# Altium PCB PCB1.PcbDoc
Units mil, origin at the board's own origin, x right, y up, seen from the top; angles counter-clockwise.
Board outline 2952.76 x 2952.76 mil, 4 copper layers (Top Layer, Mid 1 - POWER, Mid 2 - GND, Bottom Layer), stack 61.913 mil thick; 24 components, 35 nets, 184 pads, 171 vias.
Unrouted connection lines stored in the file: 1.
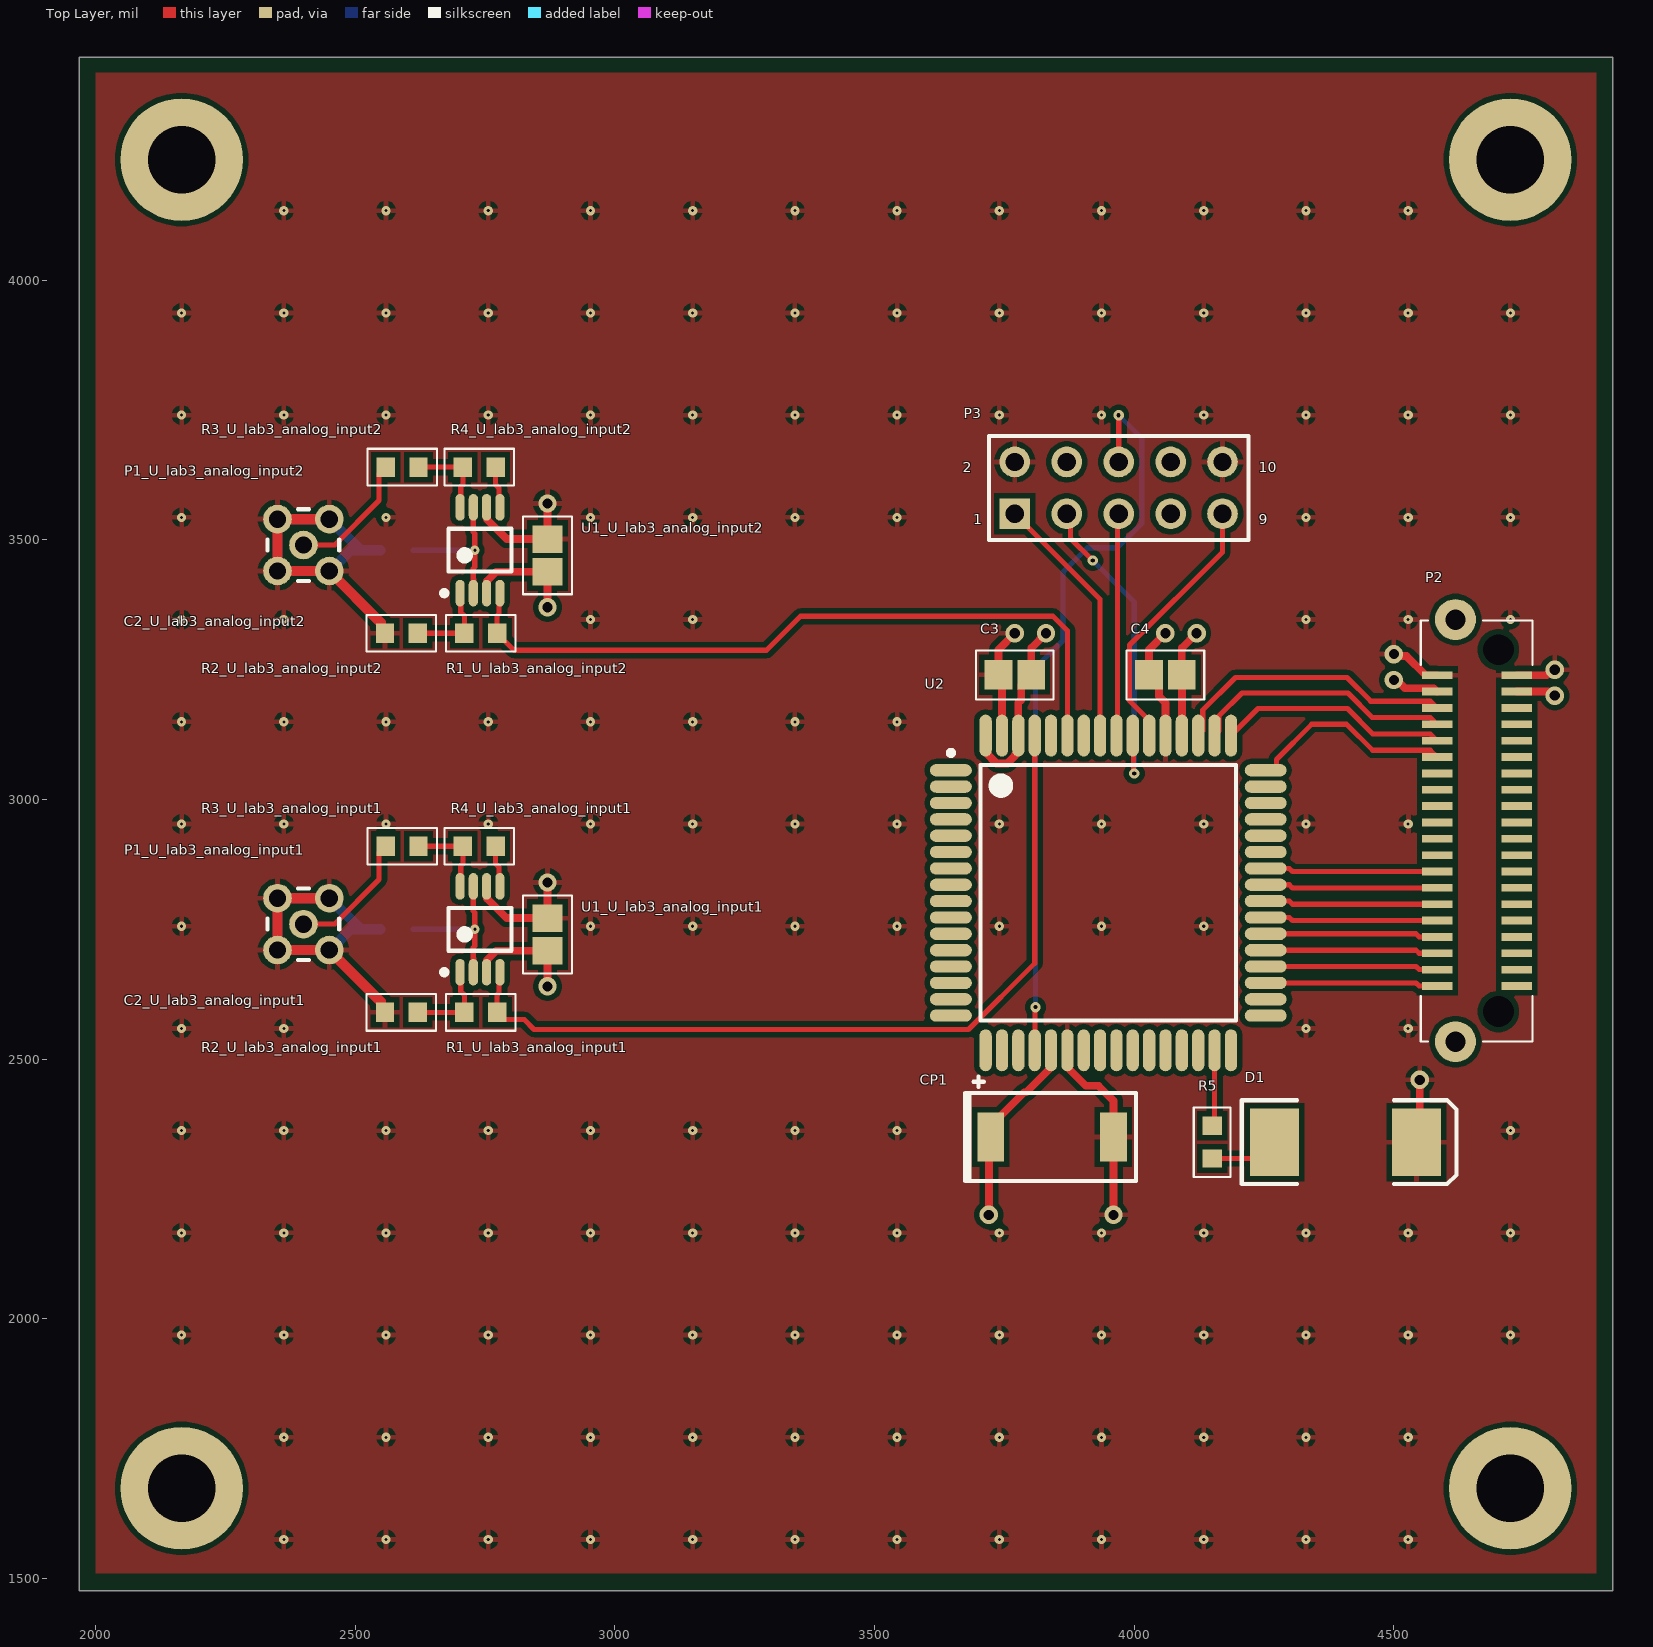
[diagram p0: Top Layer view]
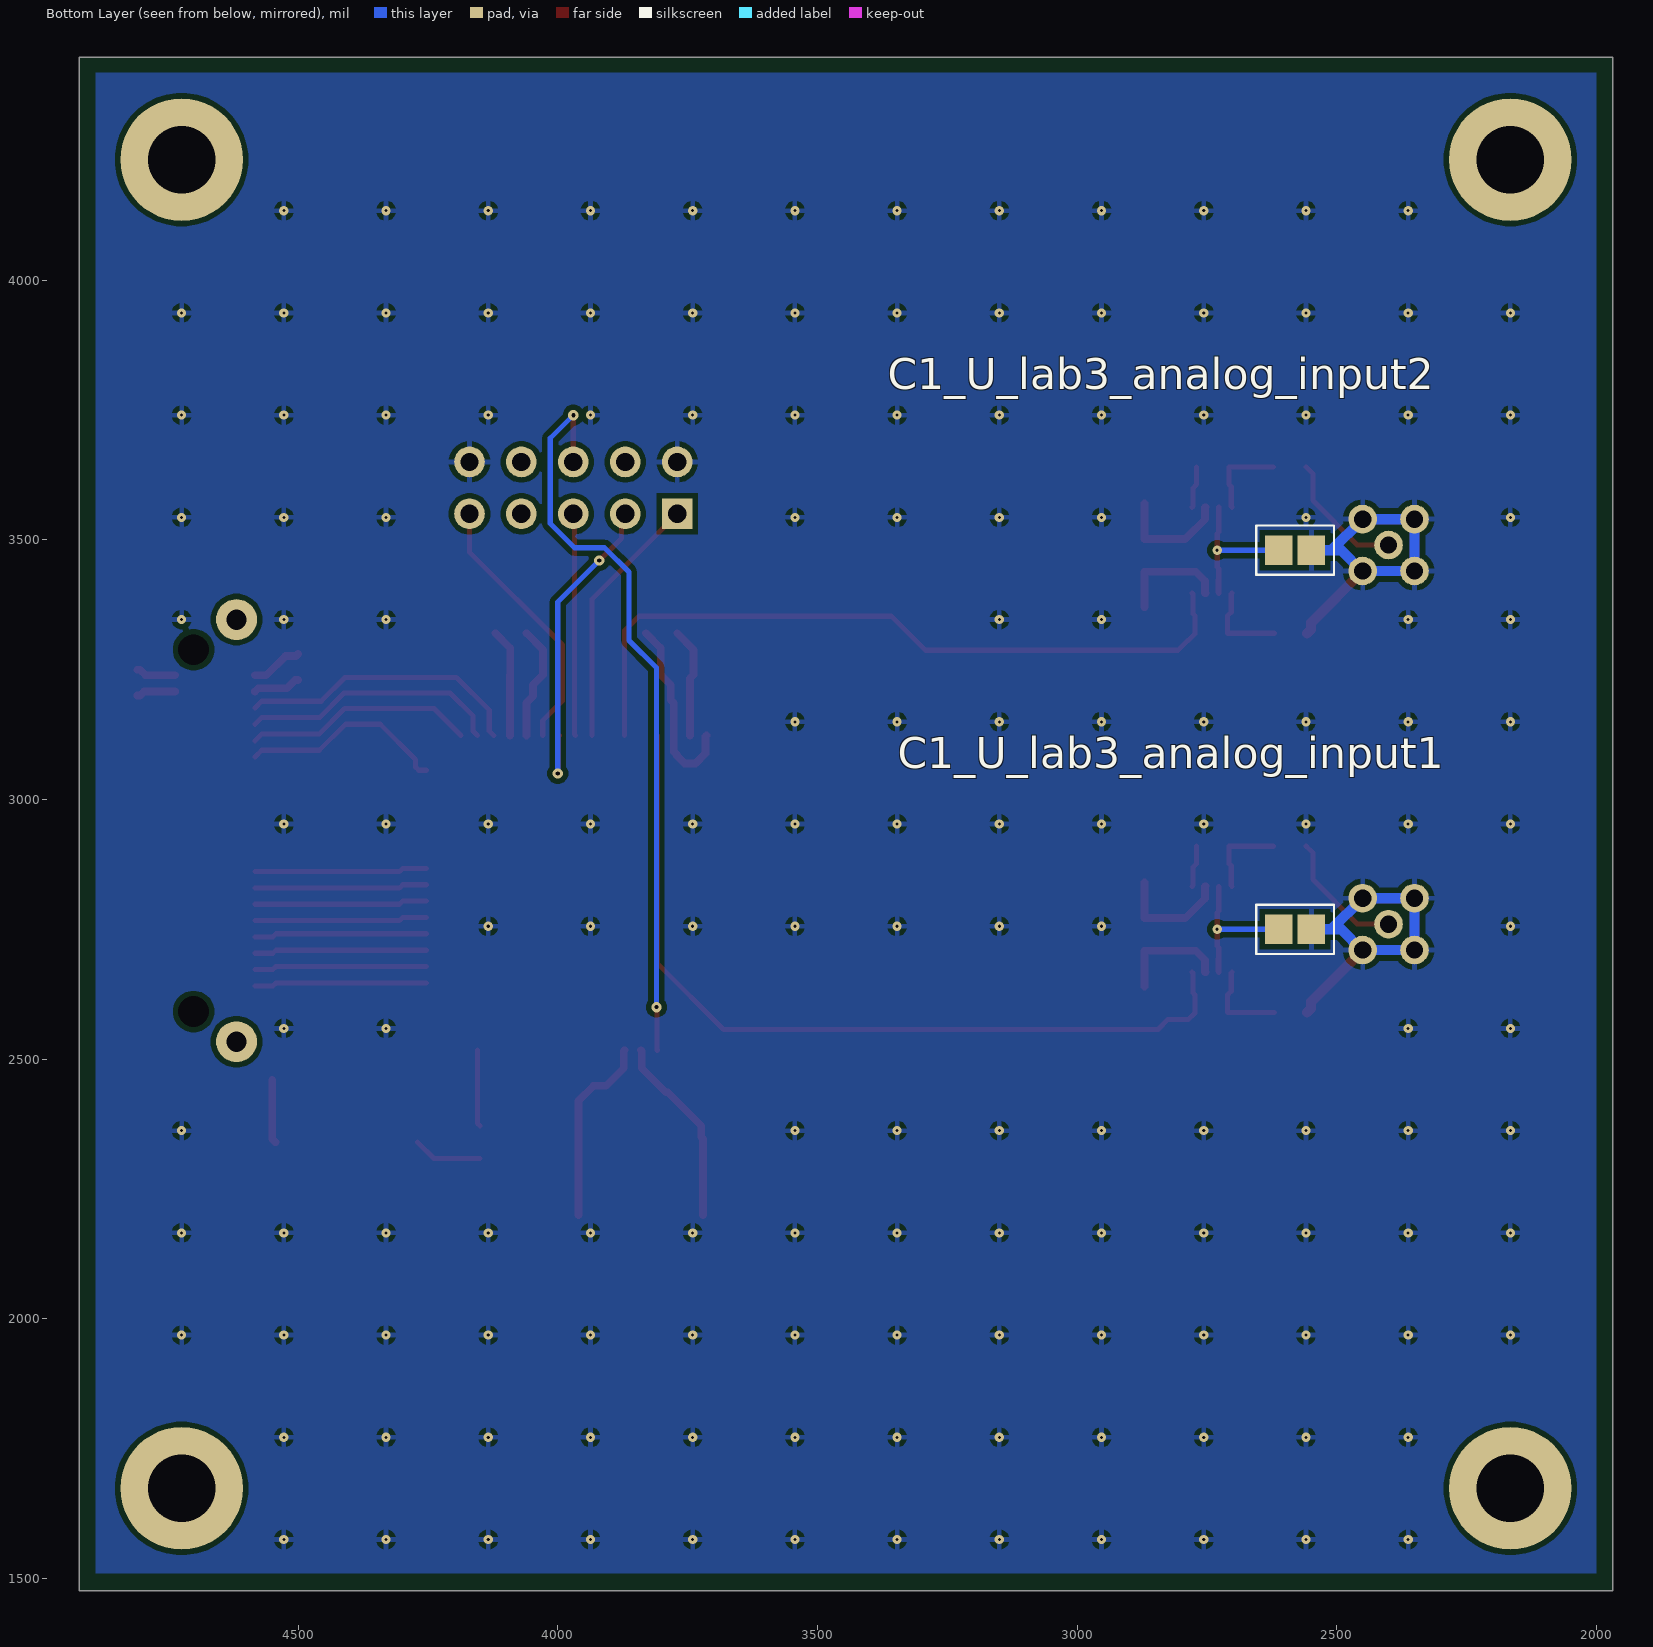
[diagram p1: Bottom Layer view, seen from below]
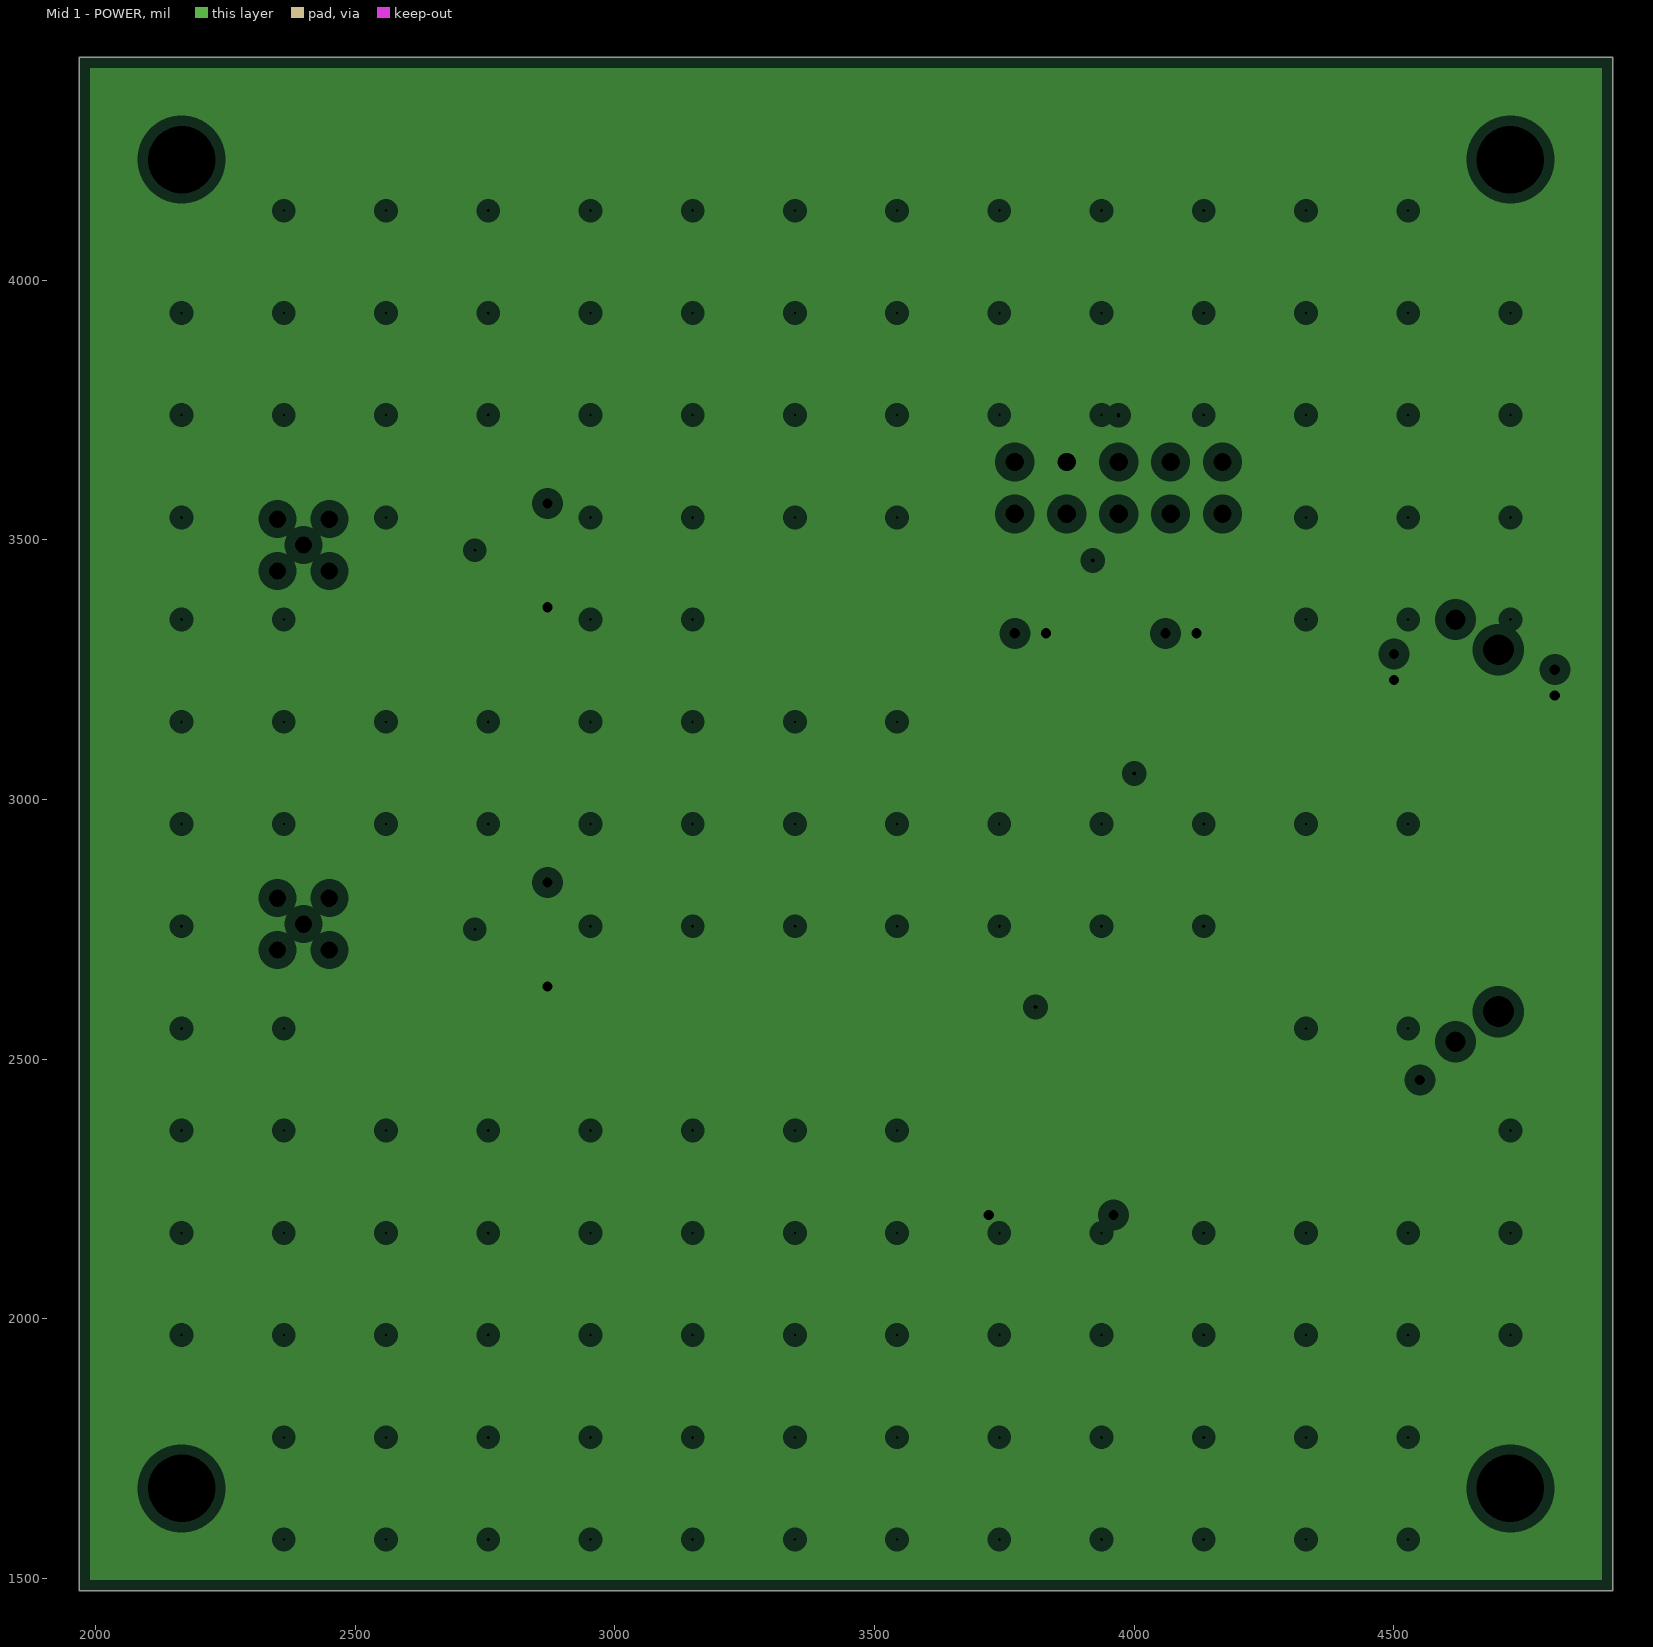
[diagram p2: Mid 1 - POWER, clearances drawn from the general rule]
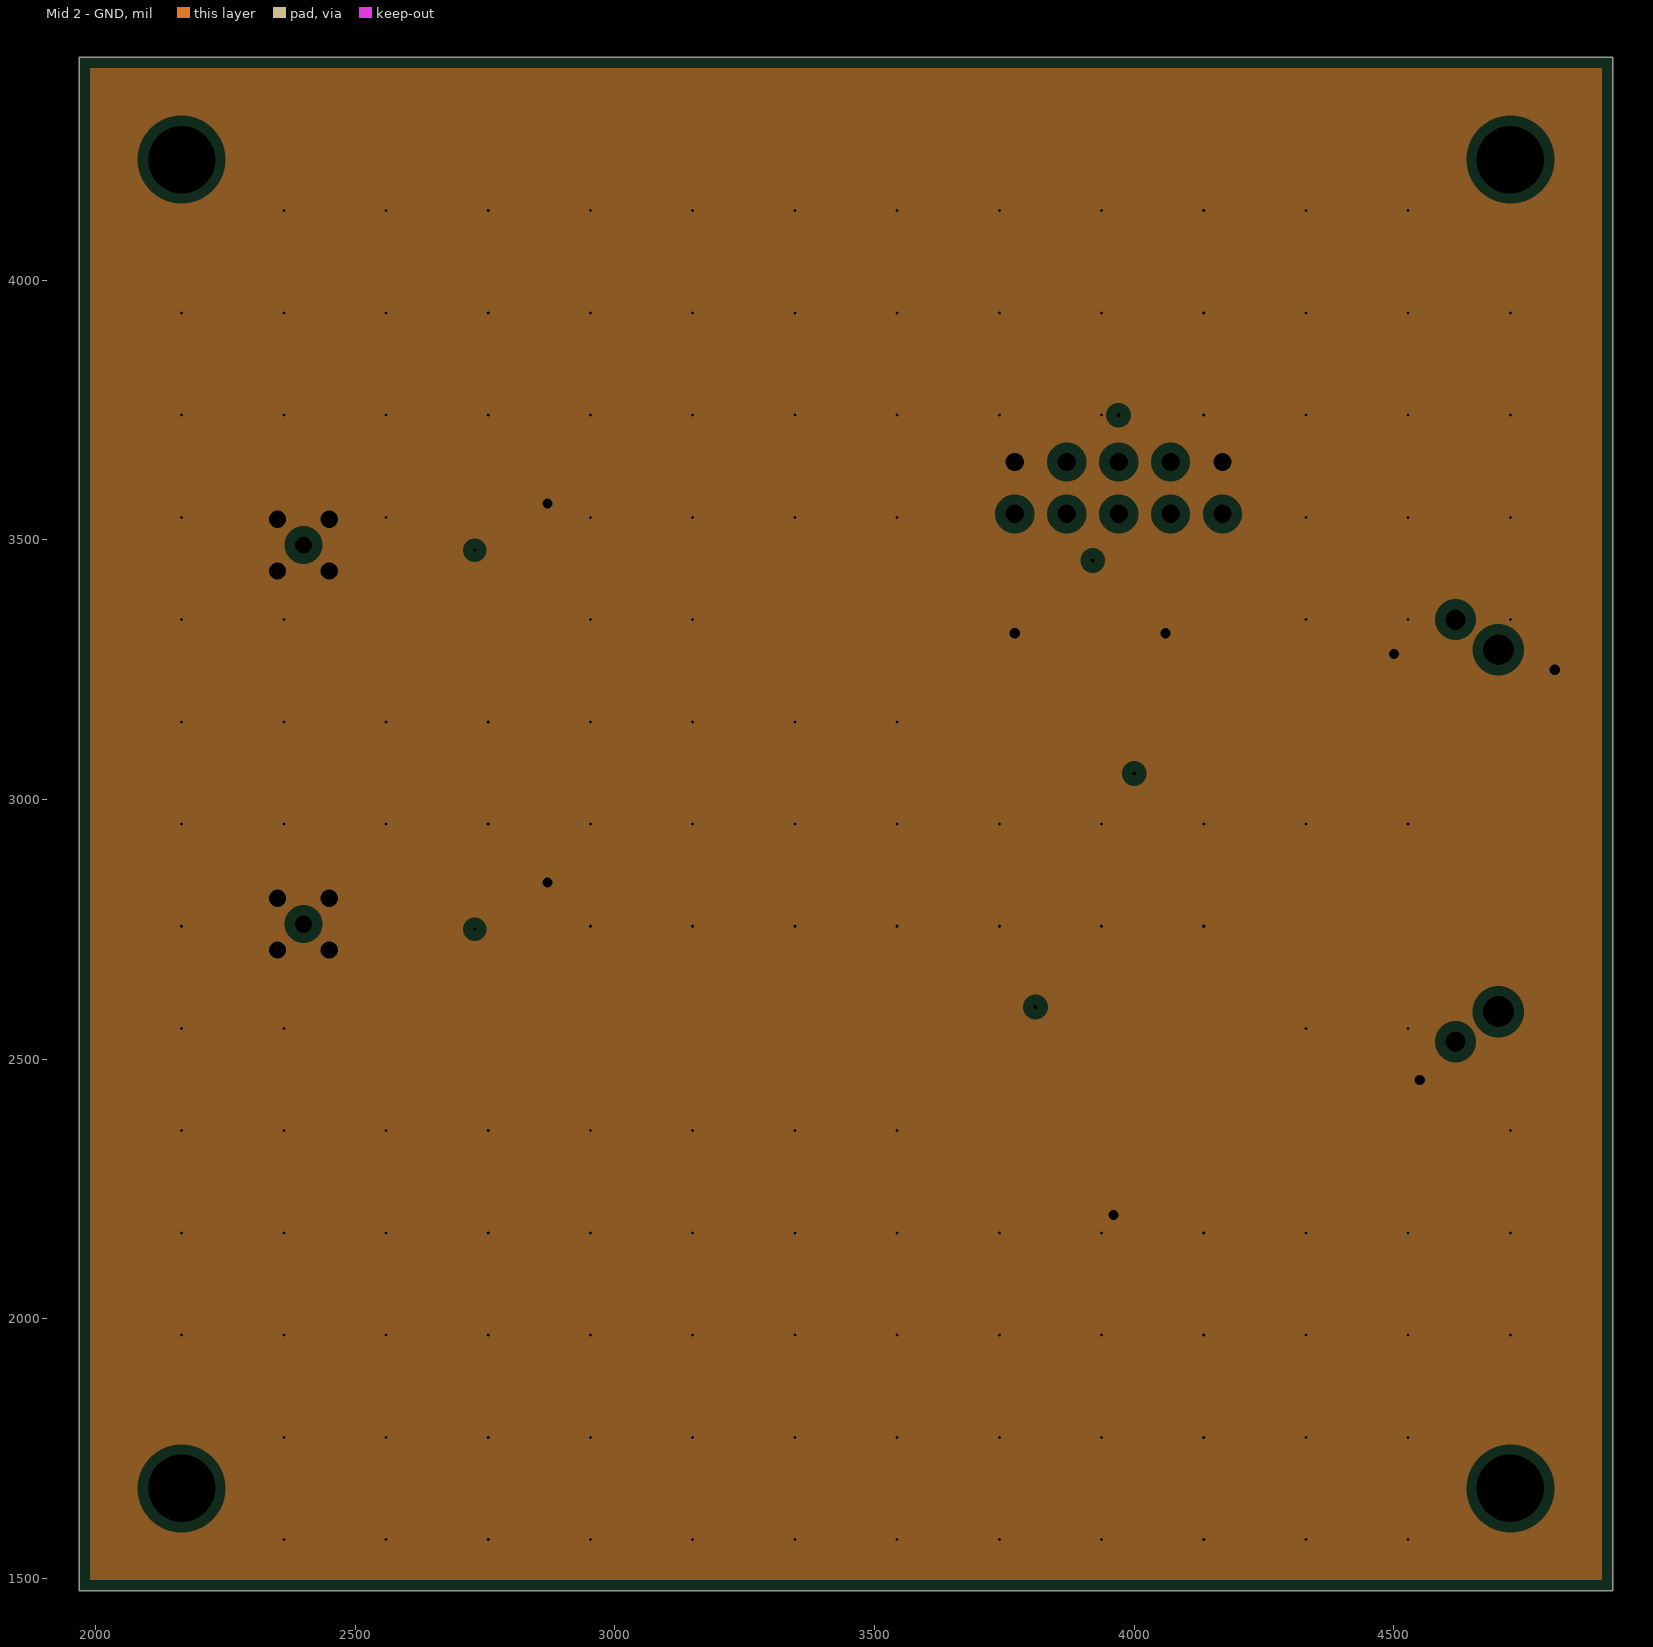
[diagram p3: Mid 2 - GND, clearances drawn from the general rule]
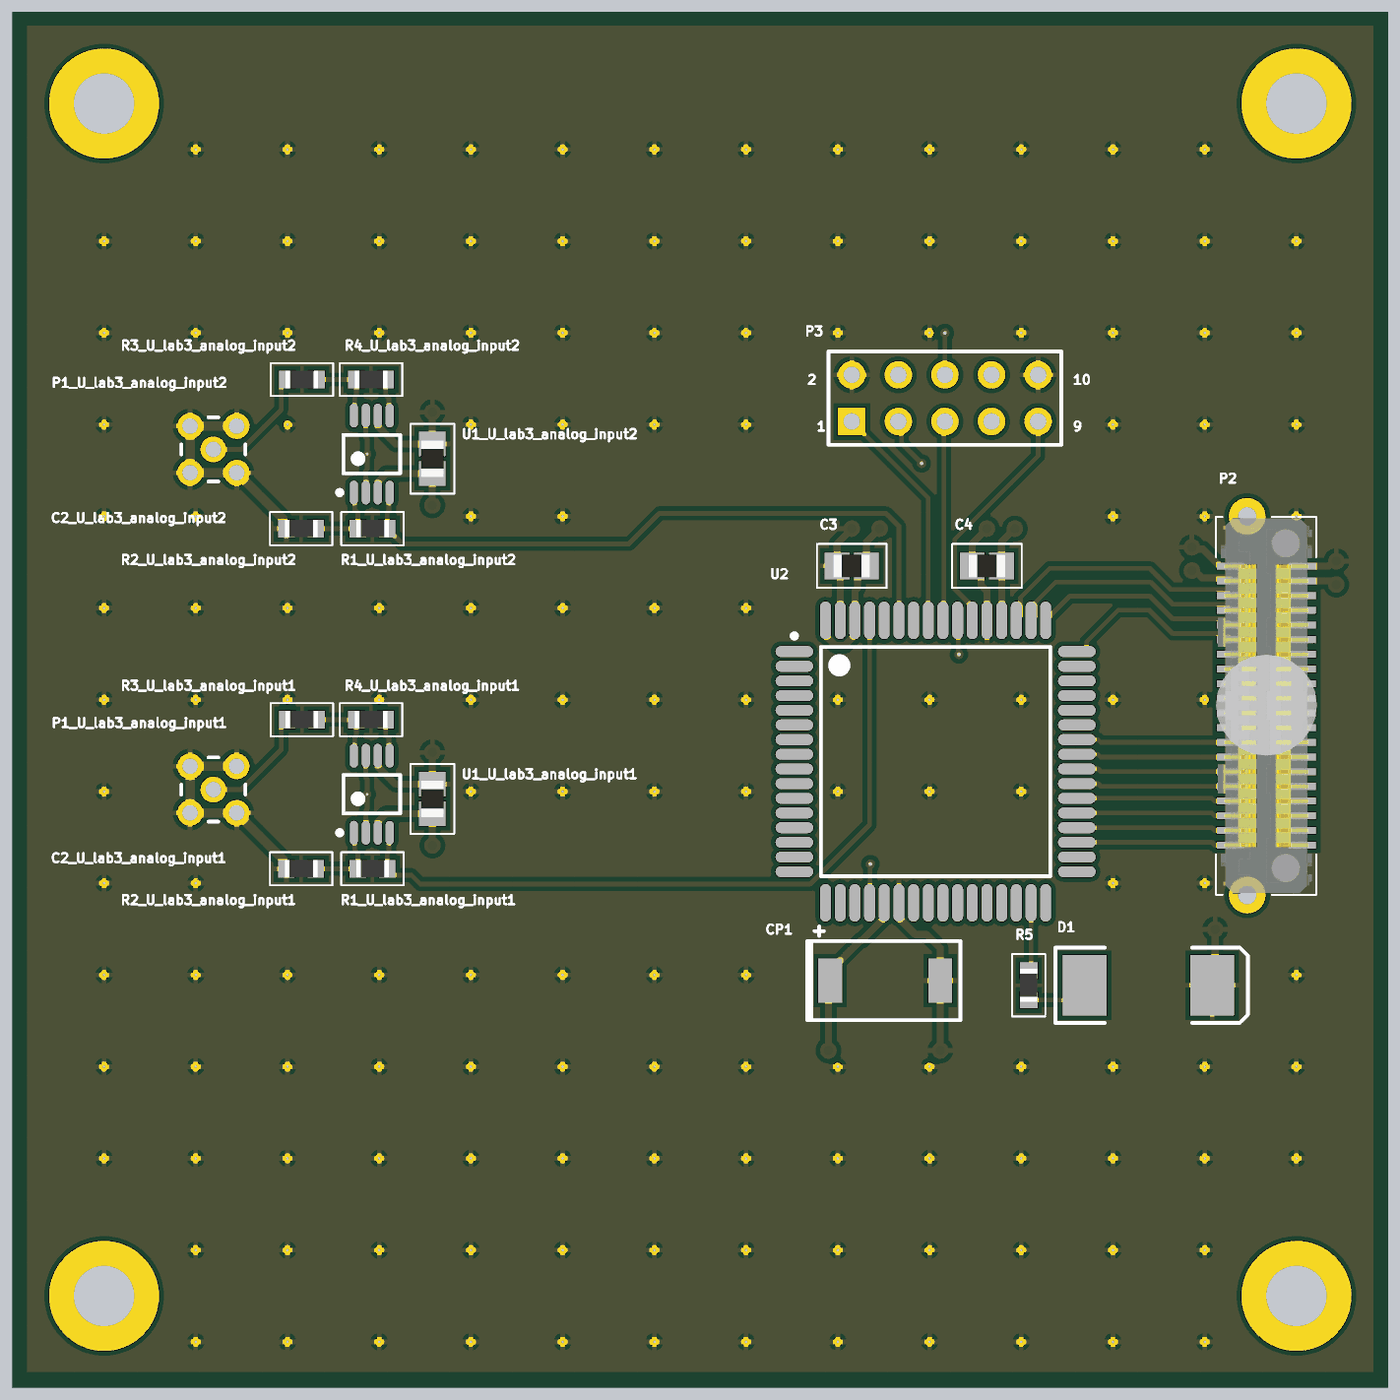
[diagram p4: 3D render of the assembled board from above, using the file's embedded part models]

## Layer stack, top to bottom
Top Solder: solder mask 0.4, Solder Resist, Dk 3.9
Top Layer: signal copper 0.7087
Dielectric 1: prepreg 14.8346, PP-021, Dk 3.9
Mid 1 - POWER: plane copper 1.378, net 5V0
Dielectric 2: core 28.0709, Core-039, Dk 3.9
Mid 2 - GND: plane copper 1.378, net GND
Dielectric 3: prepreg 14.8346, PP-021, Dk 3.9
Bottom Layer: signal copper 0.7087
Bottom Solder: solder mask 0.4, Solder Resist, Dk 3.9

## Board outline
1968.5,1476.38 1968.5,4429.13 4921.26,4429.13 4921.26,1476.38

## Design rules (kind name [scope] priority, off if disabled: settings)
Clearance [All] p1: gap=10 ignorepadtopadclearanceinfootprint=TRUE except(5.91: Arc-SMDPad Track-SMDPad)
HoleSize [All] p1: absolutevalues=TRUE maxlimit=236.22 minlimit=3.94 maxpercent=80.000 minpercent=20.000
MinimumSolderMaskSliver [All] p1: minsoldermaskwidth=3.5
PlaneClearance [All] p1: clearance=20
PlaneConnect [All] p1: planeconnectstyle=Relief reliefexpansion=20 reliefentries=4 reliefconductorwidth=10 reliefairgap=10
PolygonConnect [All] p1: connectstyle=Relief reliefconductorwidth=10 reliefentries=4 polygonreliefangle="90 Angle" airgapwidth=10
RoomDefinition Analog_input_1 [InComponentClass('U_lab3_analog_input1')] p1: confinementstyle=ConfineIn formatcopy=TRUE lockcomponents=FALSE outline 2300,2540 2930,2540 2930,2960 2300,2960
RoomDefinition Analog_Input_2 [InComponentClass('U_lab3_analog_input2')] p2: confinementstyle=ConfineIn formatcopy=TRUE lockcomponents=FALSE outline 2300,3270 2930,3270 2930,3690 2300,3690
RoutingVias [All] p1: holewidth=28 width=50 viastyle="Through Hole" minholewidth=28 minwidth=50 maxholewidth=28 maxwidth=50
SolderMaskExpansion [All] p1: expansion=2 istentingtop=FALSE
SupplyNets "Schematic Supply Nets_1" [InNet('5V0')] p1: voltage=0.000
SupplyNets "Schematic Supply Nets" [InNet('GND')] p2: voltage=0.000
Width "Schematic Width Constraint_1" [InNet('5V0')] p1: maxlimit=50 minlimit=15 preferedwidth=20 minimp=50.000000 maximp=50.000000 favimp=50.000000
Width "Schematic Width Constraint" [InNet('GND')] p2: maxlimit=50 minlimit=15 preferedwidth=20 minimp=50.000000 maximp=50.000000 favimp=50.000000
Width [All] p3: maxlimit=10 minlimit=10 preferedwidth=10
26 further rules are at their usual default settings.

## Classes and differential pairs
channel class lab3_analog_input: U_lab3_analog_input1 U_lab3_analog_input2
net class PC[0..7]: PC0 PC1 PC2 PC3 PC4 PC5 PC6 PC7
net class OUT_P[1..2]: OUT_P1 OUT_P2
net class OUT_N[1..2]: OUT_N1 OUT_N2
component class U_lab3_microprocessor: C3 C4 CP1 D1 R5 U2
component class U_lab3_analog_input2: C1_U_lab3_analog_input2 C2_U_lab3_analog_input2 P1_U_lab3_analog_input2 R1_U_lab3_analog_input2 R2_U_lab3_analog_input2 R3_U_lab3_analog_input2 R4_U_lab3_analog_input2 U1_U_lab3_analog_input2
component class U_lab3_analog_input1: C1_U_lab3_analog_input1 C2_U_lab3_analog_input1 P1_U_lab3_analog_input1 R1_U_lab3_analog_input1 R2_U_lab3_analog_input1 R3_U_lab3_analog_input1 R4_U_lab3_analog_input1 U1_U_lab3_analog_input1
component class lab3_schematic: P2 P3

## Components (designator, comment, footprint, x,y, rotation, side; value= is the part's Value field where it differs from the comment)
C1_U_lab3_analog_input1 "10n" 0805_STD 2580,2750 r0 bottom (schematic designator C1)
C1_U_lab3_analog_input2 "10n" 0805_STD 2580,3480 r0 bottom (schematic designator C1)
C2_U_lab3_analog_input1 "100n" 0805_STD 2870,2740 r270 top (schematic designator C2)
C2_U_lab3_analog_input2 "100n" 0805_STD 2870,3470 r270 top (schematic designator C2)
C3 "*" 0805_STD 3770,3240 r0 top
C4 "*" 0805_STD 4060,3240 r0 top
CP1 "*" VJ_TANTALUM_D 3841.89,2350 r0 top
D1 "Diode" SMC 4406.81,2340 r0 top
P1_U_lab3_analog_input1 "COAX-M" MMCX2.54-V5 2400,2760 r270 top (schematic designator P1)
P1_U_lab3_analog_input2 "COAX-M" MMCX2.54-V5 2400,3490 r270 top (schematic designator P1)
P2 "SAMTEC LSEM 40-pin" LSEM-120-03.0-L-DV-A-N-K-TR 4660,2940 r90 top
P3 "Header 5X2" HDR2X5 3770,3550 r0 top
R1_U_lab3_analog_input1 "Rfb" 0603 2741.5,2590 r0 top (schematic designator R1)
R1_U_lab3_analog_input2 "Rfb" 0603 2741.5,3320 r0 top (schematic designator R1)
R2_U_lab3_analog_input1 "Rin" 0603 2588.5,2590 r0 top (schematic designator R2)
R2_U_lab3_analog_input2 "Rin" 0603 2588.5,3320 r0 top (schematic designator R2)
R3_U_lab3_analog_input1 "Rin" 0603 2590,2910 r0 top (schematic designator R3)
R3_U_lab3_analog_input2 "Rin" 0603 2590,3640 r0 top (schematic designator R3)
R4_U_lab3_analog_input1 "Rfb" 0603 2738.5,2910 r0 top (schematic designator R4)
R4_U_lab3_analog_input2 "Rfb" 0603 2738.5,3640 r0 top (schematic designator R4)
R5 "10k" 0603 4150,2340 r90 top
U1_U_lab3_analog_input1 "LTC1992IMS8" LT-MS8-8_L 2740,2750 r90 top (schematic designator U1)
U1_U_lab3_analog_input2 "LTC1992IMS8" LT-MS8-8_L 2740,3480 r90 top (schematic designator U1)
U2 "ATmega128-16AU" 64A_M 3950,2820 r0 top

## Footprints (in the part's own frame and the unit in brackets; to place one, negate y for a bottom-side part, rotate by r counter-clockwise, add the part's x,y. Pads: shape width x height; smd on the part's side, far side on the other; paste and mask are expansions set on the pad)
64A_M [mm] "Thin QFP, 64-Leads, Body 14x14mm, Pitch 0.8mm, IPC Low Density"
  oval 2.05x0.6 smd: 1(-7.7,6) 2(-7.7,5.2) 3(-7.7,4.4) 4(-7.7,3.6) 5(-7.7,2.8) 6(-7.7,2) 7(-7.7,1.2) 8(-7.7,0.4) 9(-7.7,-0.4) 10(-7.7,-1.2) 11(-7.7,-2) 12(-7.7,-2.8) 13(-7.7,-3.6) 14(-7.7,-4.4) 15(-7.7,-5.2) 16(-7.7,-6) 33(7.7,-6) 34(7.7,-5.2) 35(7.7,-4.4) 36(7.7,-3.6) 37(7.7,-2.8) 38(7.7,-2) 39(7.7,-1.2) 40(7.7,-0.4) 41(7.7,0.4) 42(7.7,1.2) 43(7.7,2) 44(7.7,2.8) 45(7.7,3.6) 46(7.7,4.4) 47(7.7,5.2) 48(7.7,6)
  oval 0.6x2.05 smd: 17(-6,-7.7) 18(-5.2,-7.7) 19(-4.4,-7.7) 20(-3.6,-7.7) 21(-2.8,-7.7) 22(-2,-7.7) 23(-1.2,-7.7) 24(-0.4,-7.7) 25(0.4,-7.7) 26(1.2,-7.7) 27(2,-7.7) 28(2.8,-7.7) 29(3.6,-7.7) 30(4.4,-7.7) 31(5.2,-7.7) 32(6,-7.7) 49(6,7.7) 50(5.2,7.7) 51(4.4,7.7) 52(3.6,7.7) 53(2.8,7.7) 54(2,7.7) 55(1.2,7.7) 56(0.4,7.7) 57(-0.4,7.7) 58(-1.2,7.7) 59(-2,7.7) 60(-2.8,7.7) 61(-3.6,7.7) 62(-4.4,7.7) 63(-5.2,7.7) 64(-6,7.7)
  silkscreen extent -7.82,-6.25 6.25,6.97, body extent -7,-7 7,7, height 1.6
0603 [mm] "Chip Resistor, 2-Leads, Body 1.63x0.81mm, IPC Medium Density"
  rect 0.9x0.95 smd: 1(-0.8,0) 2(0.8,0)
  silkscreen extent -1.7,-0.9 1.7,0.9, body extent -0.89,-0.47 0.89,0.47, height 0.51
0805_STD [mm]
  rect 1.35x1.45 smd: 1(-0.8,0) 2(0.8,0)
  silkscreen extent -1.9,-1.2 1.9,1.2, body extent -1,-0.63 1,0.63, height 0.65
HDR2X5 [mm] "Connector; Header; 5x2 Position"
  rect 1.5x1.5 hole 0.9: 1(0,0)
  round 1.5 hole 0.9: 2(0,2.54) 3(2.54,0) 4(2.54,2.54) 5(5.08,0) 6(5.08,2.54) 7(7.62,0) 8(7.62,2.54) 9(10.16,0) 10(10.16,2.54)
  silkscreen extent -1.27,-1.27 11.43,3.81
LSEM-120-03.0-L-DV-A-N-K-TR [mm] "Samtec LSEM 40-pin"
  round 2 hole 1 paste-2539.97 mask+0: 0(-10.325,1.05) 0(10.325,1.05)
  round 2.1 on Top Solder: 0(-10.325,1.05) 0(10.325,1.05)
  round 0 hole 1.5: 0(-8.85,-1.05) 0(8.85,-1.05)
  rect 0.38x1.5 smd: 1(7.6,-1.95) 2(7.6,1.95) 3(6.8,-1.95) 4(6.8,1.95) 5(6,-1.95) 6(6,1.95) 7(5.2,-1.95) 8(5.2,1.95) 9(4.4,-1.95) 10(4.4,1.95) 11(3.6,-1.95) 12(3.6,1.95) 13(2.8,-1.95) 14(2.8,1.95) 15(2,-1.95) 16(2,1.95) 17(1.2,-1.95) 18(1.2,1.95) 19(0.4,-1.95) 20(0.4,1.95) 21(-0.4,-1.95) 22(-0.4,1.95) 23(-1.2,-1.95) 24(-1.2,1.95) 25(-2,-1.95) 26(-2,1.95) 27(-2.8,-1.95) 28(-2.8,1.95) 29(-3.6,-1.95) 30(-3.6,1.95) 31(-4.4,-1.95) 32(-4.4,1.95) 33(-5.2,-1.95) 34(-5.2,1.95) 35(-6,-1.95) 36(-6,1.95) 37(-6.8,-1.95) 38(-6.8,1.95) 39(-7.6,-1.95) 40(-7.6,1.95)
  silkscreen extent -10.31,-2.71 10.29,2.75, body extent -10.25,-2.75 10.25,2.75, height 4.58
LT-MS8-8_L [mm] "SOP, 8-Leads, Body 3x3mm, Pitch 0.65mm, IPC High Density"
  oval 1.3x0.45 smd: 1(-2.1,0.975) 2(-2.1,0.325) 3(-2.1,-0.325) 4(-2.1,-0.975) 5(2.1,-0.975) 6(2.1,-0.325) 7(2.1,0.325) 8(2.1,0.975)
  silkscreen extent -2.22,-1.55 1.05,1.87, body extent -1.55,-1.55 1.55,1.55, height 1.1
MMCX2.54-V5 [mm] "Connector; RF Coaxial, MMCX, Thru-Hole; 5 Position; Vertical"
  round 1.4 hole 0.85: 1(0,0) 2(-1.27,-1.27) 3(1.27,-1.27) 4(1.27,1.27) 5(-1.27,1.27)
  silkscreen extent -1.75,-1.75 1.75,1.75
SMC [mm] "DO-214-AB/SMC; 2 C-Bend Leads; Body 7.9 x 5.9 mm, inc. leads (LxW)"
  rect 2.4x3.3 smd: 1(-3.475,0) 2(3.475,0)
  silkscreen extent -5.07,-2.05 5.43,2.05
VJ_TANTALUM_D [mm]
  rect 1.3x2.4 smd: 1(3,0) 2(-3,0)
  silkscreen extent -4.25,-2.16 4.1,2.95, body extent -3.94,-2.16 4.1,2.16, height 2.8

## Part data
C1_U_lab3_analog_input1 C1_U_lab3_analog_input2 C2_U_lab3_analog_input1 C2_U_lab3_analog_input2 C3 C4: library part Capacitor
CP1: library part Capacitor_polarized
D1: "Default Diode", Code_JEDEC=DO-214-AB, LatestRevisionDate=17-Jul-2002, LatestRevisionNote="Re-released for DXP Platform.", PackageDescription="DO-214-AB/SMC; 2 C-Bend Leads; Body 7.9 x 5.9 mm, inc. leads (LxW)", PackageReference=SMC, PackageVersion=Sep-1996, Published=8-Jun-2000, Publisher="Altium Limited"
P1_U_lab3_analog_input1 P1_U_lab3_analog_input2: "RF Coaxial PCB Connector, MMCX; Thru-Hole, Vertical Mount Plug,  50 Ohm Impedance", PackageDocument="Rev. A, 16-Jun-1997", ComponentLink1Description="Manufacturer Link", ComponentLink1URL=http://www.amphenolrf.com/, DatasheetDocument=30-May-2003, DrillSize="Corresponds to nominal value.", LatestRevisionDate=15-Jul-2004, LatestRevisionNote="Component Replaced.", PackageReference=908-21103, PCB_Layout="Complies with manufacturer's recommendation.", Published=15-Jul-2004, Publisher="Altium Limited"
P2: library part LSEM-120-03.0-X-DV-A-N-K, Manufacturer=SAMTEC, Part Number=LSEM-120-03.0-X-DV-A-N-K
P3: "Header, 5-Pin, Dual row", LatestRevisionDate=17-Jul-2002, LatestRevisionNote="Re-released for DXP Platform.", Publisher="Altium Limited"
R1_U_lab3_analog_input1 R1_U_lab3_analog_input2 R2_U_lab3_analog_input1 R2_U_lab3_analog_input2 R3_U_lab3_analog_input1 R3_U_lab3_analog_input2 R4_U_lab3_analog_input1 R4_U_lab3_analog_input2 R5: library part Resistor
U1_U_lab3_analog_input1 U1_U_lab3_analog_input2: library part CMP-0359-00506-2, "Single Channel, Low Power, Fully Differential Input / Output Amplifier / Driver, 4 MHz Typical GBW, 0.75 V/us Typical SR, 2.4 to 12 V, 8-Pin SOP (MS8-8), Industrial", Linear Technology Part Number=LTC1992, Manufacturer="Linear Technology", Channels (#)=1, ComponentLink1Description="Manufacturer URL", ComponentLink1URL=http://www.linear.com/, ComponentLink2Description=Datasheet, ComponentLink2URL=http://cds.linear.com/docs/en/datasheet/1992fb.pdf, ComponentLink3Description="Package Specification", ComponentLink3URL=http://cds.linear.com/docs/en/packaging/05081610_G_SO8.pdf, DatasheetVersion="Rev. A", GBW (MHz) Typical=4, Is (mA) Typical=0.65, Mounting Technology="Surface Mount", PackageDescription="8-Lead Plastic Small Outline, Body 3.9 x 4.9 mm, Pitch 1.27 mm", PackageReference=LT-MS8-8, PackageVersion="Rev G", PartNumber=LTC1992IMS8, RevisionNote="URLs updated", SR (V/us) Typical=0.75, Type=DIFF, Vos (mV) Typical=0.25, Vs Max (V)=12, Vs Min (V)=2.4
U2: library part CMP-0095-00259-2, "8-bit AVR Microcontroller, 4.5-5.5V, 128KB Flash, 4KB EEPROM, 4KB SRAM, 64-pin TQFP, Industrial Grade (-40°C to 85°C)", Code_JEDEC=MS-026-AEB, ComponentLink1Description="Manufacturer URL", ComponentLink1URL=http://www.atmel.com/, ComponentLink2Description="ATmega128(L) Datasheet", ComponentLink2URL=http://www.atmel.com/dyn/resources/prod_documents/doc2467.pdf, ComponentLink3Description="ATmega128(L) Summary", ComponentLink3URL=http://www.atmel.com/dyn/resources/prod_documents/2467S.pdf, DatasheetVersion="revX, Jun-2011", PackageDescription="64-Pin Plastic Thin Profile Quad Flat Pack, 14 x 14 x 1.0 mm Body, 0.8 mm Pitch (TQFP)", PackageReference=64A, PackageVersion="revC, Oct-2010", RevisionNote="PackageVersion updated. URLs added."

## Free pads (board coordinates)
  round 236.22 hole 129.92: 3(2165.35,1673.23) 3(2165.35,4232.28) 3(4724.41,1673.23) 3(4724.41,4232.28)

## Via types
v1: diameter 17.72/17.72 (per signal layer), hole 5.91, Top Layer to Bottom Layer, 150 vias
v2: diameter 35.43, hole 19.68, Top Layer to Mid 2 - GND, tented both sides, 8 vias
v3: diameter 35.43, hole 19.68, Top Layer to Mid 1 - POWER, tented both sides, 7 vias
v4: diameter 19.68, hole 7.87, Top Layer to Bottom Layer, tented both sides, 4 vias
v5: diameter 17.72/17.72 (per signal layer), hole 5.91, Top Layer to Bottom Layer, tented both sides, 2 vias

## Nets (pads, with @x,y where several pads share a name; then routed paths per layer and width w, separated by ;. In a path a pad name is that pad's centre, name@x,y a point inside that pad or via, vN(x,y) a via of type N, cw(c..) or ccw(c..) an arc to the next point about the centre after c; other vN are vias at no path point)
5V0: C2_U_lab3_analog_input1.2 C2_U_lab3_analog_input2.2 C3.2 C4.2 CP1.2 P2.3 P2.4 P3.4 U1_U_lab3_analog_input1.3 U1_U_lab3_analog_input2.3 U2.21 U2.52 U2.62 U2.64 | length 1543.3
  Top Layer w15: U1_U_lab3_analog_input1.3 2753.32,2667.84 2753.32,2690.47 2771.35,2708.5 C2_U_lab3_analog_input1.2 v3(2870,2640) ; U1_U_lab3_analog_input2.3 2753.32,3397.84 2753.32,3420.47 2771.35,3438.5 C2_U_lab3_analog_input2.2 v3(2870,3370) ; U2.64 3715.43,3121.5 3715.43,3088.79 3734.83,3069.39 3755.72,3069.39 3770.49,3084.16 3770.49,3085.99 3776.77,3092.27 U2.62 3776.77,3186 3782.42,3191.65 3782.42,3220.93 C3.2 3801.5,3291.5 v3(3830,3320) ; v3(3720,2200) 3720,2346.22 CP1.2 3723.78,2371.65 3788.24,2436.12 3791.74,2436.12 3838.11,2482.49 3838.11,2515.2 U2.21 ; U2.52 4091.73,3239.76 C4.2 4091.5,3291.5 v3(4120,3320) ; v3(4500,3230) 4505.53,3230 4521.32,3214.21 4576.91,3214.21 P2.4@4583.39,3207.74 ; P2.4 P2.4@4583.37,3207.72 ; P2.3 4796.75,3207.72 4804.47,3200 v3(4810,3200)
\R\E\S\E\T\: P3.6 U2.20 | length 1451.1
  Top Layer w10: U2.20 3809.13,2517.72 3809.13,2599.13 v4(3810,2600) ; P3.6 v4(3970,3740)
  Bottom Layer w10: v4(3810,2600) 3810,3253.73 3862.72,3306.45 3862.72,3437.85 3909.71,3484.84 3967.81,3484.84 4014.53,3531.56 4014.53,3695.47 v4(3970,3740)
ADC1_N: U2.60
ADC2_N: U2.58
GND: C1_U_lab3_analog_input1.1 C1_U_lab3_analog_input2.1 C2_U_lab3_analog_input1.1 C2_U_lab3_analog_input2.1 C3.1 C4.1 CP1.1 D1.2 P1_U_lab3_analog_input1.2 P1_U_lab3_analog_input1.3 P1_U_lab3_analog_input1.4 P1_U_lab3_analog_input1.5 P1_U_lab3_analog_input2.2 P1_U_lab3_analog_input2.3 P1_U_lab3_analog_input2.4 P1_U_lab3_analog_input2.5 P2.1 P2.2 P3.2 P3.10 R2_U_lab3_analog_input1.1 R2_U_lab3_analog_input2.1 U1_U_lab3_analog_input1.6 U1_U_lab3_analog_input2.6 U2.22 U2.53 U2.63 | length 3501.1
  Top Layer w15: U1_U_lab3_analog_input1.6 2753.32,2832.16 2753.32,2809.53 2791.35,2771.5 C2_U_lab3_analog_input1.1 v2(2870,2840) ; U1_U_lab3_analog_input2.6 2753.32,3562.16 2753.32,3539.53 2791.35,3501.5 C2_U_lab3_analog_input2.1 v2(2870,3570) ; U2.63 3745.28,3233.23 C3.1 3738.5,3288.5 v2(3770,3320) ; U2.22 3872.91,2515.2 3872.91,2482.49 3906.6,2448.8 3930.94,2448.8 3960,2419.74 CP1.1 v2(3960,2200) ; v2(4060,3320) 4028.5,3288.5 C4.1 4047.58,3220.93 4047.58,3198.66 4060.24,3186 U2.53 ; v2(4500,3280) 4503.91,3276.09 4524.34,3276.09 4561.22,3239.21 P2.2 ; D1.2 4550,2346.38 v2(4550,2460) ; P2.1 4793.68,3239.21 4804.47,3250 v2(4810,3250)
  Top Layer w20: P1_U_lab3_analog_input1.5 P1_U_lab3_analog_input1.2 P1_U_lab3_analog_input1.3 P1_U_lab3_analog_input1.4 2549.29,2610.71 2549.29,2597.72 R2_U_lab3_analog_input1.1 ; P1_U_lab3_analog_input2.5 P1_U_lab3_analog_input2.2 P1_U_lab3_analog_input2.3 P1_U_lab3_analog_input2.4 2549.29,3340.71 2549.29,3327.72 R2_U_lab3_analog_input2.1
  Bottom Layer w20: 2519.95,2750 2510,2750 ; 2519.95,3480 2510,3480 ; C1_U_lab3_analog_input1.1 2510,2750 ; C1_U_lab3_analog_input2.1 2510,3480 ; 2510,2750 P1_U_lab3_analog_input1.5 P1_U_lab3_analog_input1.2 P1_U_lab3_analog_input1.3 P1_U_lab3_analog_input1.4 2451.4,2710 2491.4,2750 2510,2750 ; 2510,3480 2491.4,3480 2451.4,3440 P1_U_lab3_analog_input2.4 P1_U_lab3_analog_input2.3 P1_U_lab3_analog_input2.2 P1_U_lab3_analog_input2.5 2510,3480
  other v1: 2362.2,1574.8 2559.05,1574.8 2755.9,1574.8 2952.75,1574.8 3149.6,1574.8 3346.45,1574.8 3543.3,1574.8 3740.15,1574.8 3937,1574.8 4133.85,1574.8 4330.7,1574.8 4527.55,1574.8 2362.2,1771.65 2559.05,1771.65 2755.9,1771.65 2952.75,1771.65 3149.6,1771.65 3346.45,1771.65 3543.3,1771.65 3740.15,1771.65 3937,1771.65 4133.85,1771.65 4330.7,1771.65 4527.55,1771.65 2165.35,1968.5 2362.2,1968.5 2559.05,1968.5 2755.9,1968.5 2952.75,1968.5 3149.6,1968.5 3346.45,1968.5 3543.3,1968.5 3740.15,1968.5 3937,1968.5 4133.85,1968.5 4330.7,1968.5 4527.55,1968.5 4724.4,1968.5 2165.35,2165.35 2362.2,2165.35 2559.05,2165.35 2755.9,2165.35 2952.75,2165.35 3149.6,2165.35 3346.45,2165.35 3543.3,2165.35 3740.15,2165.35 3937,2165.35 4133.85,2165.35 4330.7,2165.35 4527.55,2165.35 4724.4,2165.35 2165.35,2362.2 2362.2,2362.2 2559.05,2362.2 2755.9,2362.2 2952.75,2362.2 3149.6,2362.2 3346.45,2362.2 3543.3,2362.2 4724.4,2362.2 2165.35,2559.05 2362.2,2559.05 4330.7,2559.05 4527.55,2559.05 2165.35,2755.9 2952.75,2755.9 3149.6,2755.9 3346.45,2755.9 3543.3,2755.9 3740.15,2755.9 3937,2755.9 4133.85,2755.9 2165.35,2952.75 2362.2,2952.75 2559.05,2952.75 2755.9,2952.75 2952.75,2952.75 3149.6,2952.75 3346.45,2952.75 3543.3,2952.75 3740.15,2952.75 3937,2952.75 4133.85,2952.75 4330.7,2952.75 4527.55,2952.75 2165.35,3149.6 2362.2,3149.6 2559.05,3149.6 2755.9,3149.6 2952.75,3149.6 3149.6,3149.6 3346.45,3149.6 3543.3,3149.6 2165.35,3346.45 2362.2,3346.45 2952.75,3346.45 3149.6,3346.45 4330.7,3346.45 4527.55,3346.45 4724.4,3346.45 2165.35,3543.3 2559.05,3543.3 2952.75,3543.3 3149.6,3543.3 3346.45,3543.3 3543.3,3543.3 4330.7,3543.3 4527.55,3543.3 4724.4,3543.3 2165.35,3740.15 2362.2,3740.15 2559.05,3740.15 2755.9,3740.15 2952.75,3740.15 3149.6,3740.15 3346.45,3740.15 3543.3,3740.15 3740.15,3740.15 3937,3740.15 4133.85,3740.15 4330.7,3740.15 4527.55,3740.15 4724.4,3740.15 2165.35,3937 2362.2,3937 2559.05,3937 2755.9,3937 2952.75,3937 3149.6,3937 3346.45,3937 3543.3,3937 3740.15,3937 3937,3937 4133.85,3937 4330.7,3937 4527.55,3937 4724.4,3937 2362.2,4133.85 2559.05,4133.85 2755.9,4133.85 2952.75,4133.85 3149.6,4133.85 3346.45,4133.85 3543.3,4133.85 3740.15,4133.85 3937,4133.85 4133.85,4133.85 4330.7,4133.85 4527.55,4133.85
IN_U_lab3_analog_input1: P1_U_lab3_analog_input1.1 R3_U_lab3_analog_input1.1 | length 250.9
  Top Layer w10: P1_U_lab3_analog_input1.1 2460.19,2760 2545.79,2845.6 2545.79,2897.28 R3_U_lab3_analog_input1.1
IN_U_lab3_analog_input2: P1_U_lab3_analog_input2.1 R3_U_lab3_analog_input2.1 | length 250.9
  Top Layer w10: P1_U_lab3_analog_input2.1 2460.19,3490 2545.79,3575.6 2545.79,3627.28 R3_U_lab3_analog_input2.1
NetC1_U_lab3_analog_input1_2: C1_U_lab3_analog_input1.2 U1_U_lab3_analog_input1.2 U1_U_lab3_analog_input1.7 | length 313.1
  Top Layer w10: U1_U_lab3_analog_input1.7 2727.2,2785.11 2730,2782.31 v5(2730,2750) 2730,2717.69 2727.2,2714.89 U1_U_lab3_analog_input1.2 2728.68,2668.8 2728.68,2693.68
  Bottom Layer w10: C1_U_lab3_analog_input1.2 v5(2730,2750)
NetC1_U_lab3_analog_input2_2: C1_U_lab3_analog_input2.2 U1_U_lab3_analog_input2.2 U1_U_lab3_analog_input2.7 | length 313.1
  Top Layer w10: U1_U_lab3_analog_input2.7 2727.2,3515.11 2730,3512.31 v5(2730,3480) 2730,3447.69 2727.2,3444.89 U1_U_lab3_analog_input2.2 2728.68,3398.8 2728.68,3423.68
  Bottom Layer w10: C1_U_lab3_analog_input2.2 v5(2730,3480)
NetD1_1: D1.1 R5.1 | length 133
  Top Layer w10: R5.1 4238.5,2308.5 D1.1
NetR1_U_lab3_analog_input1_1: R1_U_lab3_analog_input1.1 R2_U_lab3_analog_input1.2 U1_U_lab3_analog_input1.1 | length 170.8
  Top Layer w10: R2_U_lab3_analog_input1.2 R1_U_lab3_analog_input1.1 2710,2623.7 2703.09,2630.61 2703.09,2665.85 U1_U_lab3_analog_input1.1
NetR1_U_lab3_analog_input2_1: R1_U_lab3_analog_input2.1 R2_U_lab3_analog_input2.2 U1_U_lab3_analog_input2.1 | length 170.8
  Top Layer w10: R2_U_lab3_analog_input2.2 R1_U_lab3_analog_input2.1 2710,3353.7 2703.09,3360.61 2703.09,3395.85 U1_U_lab3_analog_input2.1
NetR3_U_lab3_analog_input1_2: R3_U_lab3_analog_input1.2 R4_U_lab3_analog_input1.1 U1_U_lab3_analog_input1.8 | length 165.1
  Top Layer w10: R3_U_lab3_analog_input1.2 R4_U_lab3_analog_input1.1 2707.01,2876.3 2703.09,2872.38 2703.09,2834.15 U1_U_lab3_analog_input1.8
NetR3_U_lab3_analog_input2_2: R3_U_lab3_analog_input2.2 R4_U_lab3_analog_input2.1 U1_U_lab3_analog_input2.8 | length 165.1
  Top Layer w10: R3_U_lab3_analog_input2.2 R4_U_lab3_analog_input2.1 2707.01,3606.3 2703.09,3602.38 2703.09,3564.15 U1_U_lab3_analog_input2.8
NetR5_2: R5.2 U2.31 | length 147.3
  Top Layer w10: R5.2 4154.72,2376.22 U2.31
OUT_N1: R4_U_lab3_analog_input1.2 U1_U_lab3_analog_input1.5 | length 80.8
  Top Layer w10: R4_U_lab3_analog_input1.2 2770,2876.3 2776.91,2869.39 2776.91,2834.15 U1_U_lab3_analog_input1.5
OUT_N2: R4_U_lab3_analog_input2.2 U1_U_lab3_analog_input2.5 | length 80.8
  Top Layer w10: R4_U_lab3_analog_input2.2 2770,3606.3 2776.91,3599.39 2776.91,3564.15 U1_U_lab3_analog_input2.5
OUT_P1: R1_U_lab3_analog_input1.2 U1_U_lab3_analog_input1.4 U2.61 | length 1620.3
  Top Layer w10: U1_U_lab3_analog_input1.4 2776.91,2665.85 2776.91,2627.62 2772.99,2623.7 R1_U_lab3_analog_input1.2 2772.99,2589.02 2785.71,2576.3 2825.12,2576.3 2844.14,2557.28 3681.02,2557.28 3808.27,2684.53 U2.61
OUT_P2: R1_U_lab3_analog_input2.2 U1_U_lab3_analog_input2.4 U2.59 | length 1432.4
  Top Layer w10: U1_U_lab3_analog_input2.4 2776.91,3395.85 2776.91,3357.62 2772.99,3353.7 R1_U_lab3_analog_input2.2 2772.99,3319.02 2785.71,3306.3 2786.69,3306.3 2805.71,3287.28 3291.91,3287.28 3357.35,3352.72 3843.55,3352.72 3871.26,3325.01 U2.59
PA0: P2.6 U2.51 | length 554.2
  Top Layer w10: U2.51 4132.01,3131.93 4132.01,3172.03 4194.97,3234.99 4409.65,3234.99 4455.31,3189.33 4570.12,3189.33 P2.6
PA1: P2.8 U2.50 | length 504.5
  Top Layer w10: U2.50 4163.5,3131.93 4163.5,3161.1 4207.4,3204.99 4411.37,3204.99 4458.53,3157.83 4570.12,3157.83 P2.8
PA2: P2.10 U2.49 | length 444.1
  Top Layer w10: U2.49 4238.07,3174.99 4410.52,3174.99 4459.17,3126.34 4570.12,3126.34 P2.10
PA3: P2.12 U2.48 | length 401.6
  Top Layer w10: U2.48 4267.81,3056.22 4274.1,3062.51 4274.1,3077.17 4341.92,3144.99 4409.02,3144.99 4459.17,3094.84 4570.12,3094.84 P2.12
PC0: P2.40 U2.35 | length 332.6
  Top Layer w10: U2.35 4542.72,2646.77 4548.7,2640.79 P2.40
PC1: P2.38 U2.36 | length 332.6
  Top Layer w10: U2.36 4542.72,2678.27 4548.7,2672.28 P2.38
PC2: P2.36 U2.37 | length 332.6
  Top Layer w10: U2.37 4542.72,2709.76 4548.7,2703.78 P2.36
PC3: P2.34 U2.38 | length 332.6
  Top Layer w10: U2.38 4542.72,2741.26 4548.7,2735.28 P2.34
PC4: P2.32 U2.39 | length 332.6
  Top Layer w10: U2.39 4298.5,2772.76 4304.49,2766.77 P2.32
PC5: P2.30 U2.40 | length 332.6
  Top Layer w10: U2.40 4298.5,2804.25 4304.49,2798.27 P2.30
PC6: P2.28 U2.41 | length 332.6
  Top Layer w10: U2.41 4298.5,2835.75 4304.49,2829.76 P2.28
PC7: P2.26 U2.42 | length 332.6
  Top Layer w10: U2.42 4298.5,2867.24 4304.49,2861.26 P2.26
TCK: P3.1 U2.57 | length 494.9
  Top Layer w10: P3.1 3934.25,3385.75 U2.57
TDI: P3.9 U2.54 | length 516.6
  Top Layer w10: U2.54 4028.74,3152.32 3991.02,3190.04 3991.02,3297.29 4170,3476.27 P3.9
TDO: P3.3 U2.55 | length 628.1
  Top Layer w10: P3.3 3877.15,3542.85 3877.15,3502.85 v4(3920,3460) ; U2.55 3998.62,3121.77 3998.62,3051.38 v4(4000,3050)
  Bottom Layer w10: v4(3920,3460) 4000,3380 v4(4000,3050)
TMS: P3.5 U2.56 | length 428.6
  Top Layer w10: U2.56 3967.87,3125.28 3967.87,3547.87 P3.5
pads on no net: P2.0 P2.5 P2.7 P2.9 P2.11 P2.13 P2.14 P2.15 P2.16 P2.17 P2.18 P2.19 P2.20 P2.21 P2.22 P2.23 P2.24 P2.25 P2.27 P2.29 P2.31 P2.33 P2.35 P2.37 P2.39 P3.7 P3.8 U2.1 U2.2 U2.3 U2.4 U2.5 U2.6 U2.7 U2.8 U2.9 U2.10 U2.11 U2.12 U2.13 U2.14 U2.15 U2.16 U2.17 U2.18 U2.19 U2.23 U2.24 U2.25 U2.26 U2.27 U2.28 U2.29 U2.30 U2.32 U2.33 U2.34 U2.43 U2.44 U2.45 U2.46 U2.47

## Polygon pours and split planes (outlines as drawn)
GND on Bottom Layer "GND_L04_P001" (solid, pour order 1): 2000,4400 4890,4400 4890,1510 2000,1510
GND on Top Layer "GND_L01_P000" (solid, pour order 0): 2000,4400 4890,4400 4890,1510 2000,1510
5V0 on Mid 1 - POWER (split plane): 4901.16,1496.47 1988.6,1496.47 1988.6,4409.04 4901.16,4409.04
GND on Mid 2 - GND (split plane): 4901.16,1496.47 1988.6,1496.47 1988.6,4409.04 4901.16,4409.04

## Dimensions
2165.35,4232.28 to 4724.41,4232.28 on Mechanical 5 (Mech5)
4921.26,1476.38 to 1968.5,1476.38 on Mechanical 5 (Mech5)
4921.26,1476.38 to 4921.26,4429.13 on Mechanical 5 (Mech5)

## Text inside footprints (layer, text, board x,y; h text height)
P3: Top Overlay "10" at 4240,3630 h19.68; Top Overlay "9" at 4240,3530 h19.68; Top Overlay "1" at 3690,3530 h19.68; Top Overlay "2" at 3670,3630 h19.68